# EAGLE board mybutton (EAGLE 9.3.0)
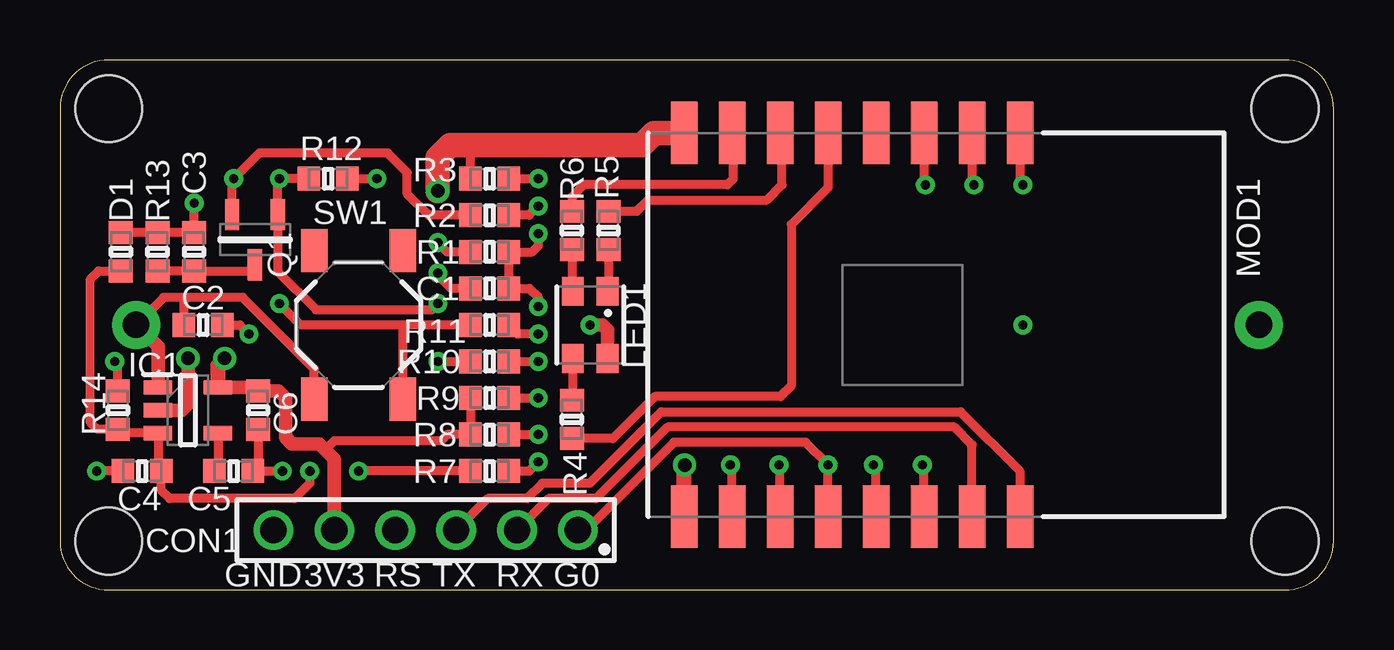
[diagram p0: board, top side]
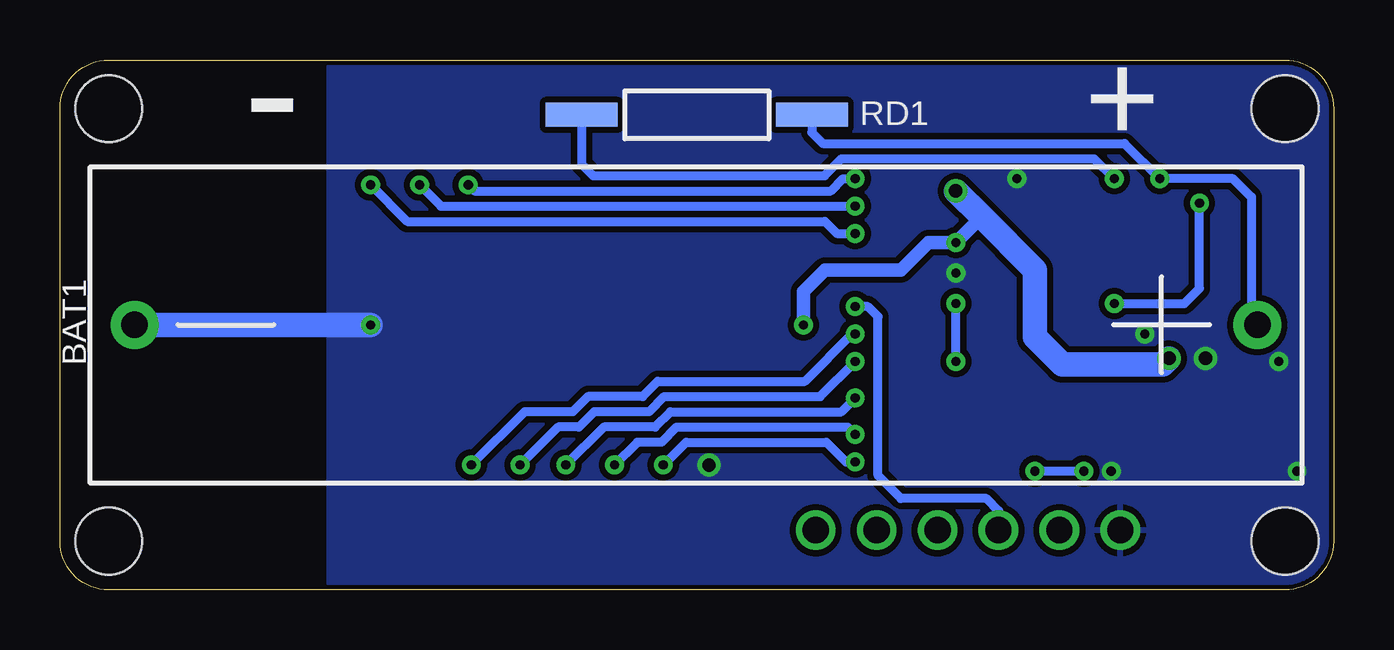
[diagram p1: board, bottom side, seen from below]

Size 53.09 x 22.1 mm. Coordinates in mm from the lower left corner, seen from the top.
Outline: 53.09,2.03 53.09,20.07 arc90 51.05,22.1 2.03,22.1 arc90 0,20.07 0,2.03 arc90 2.03,0 51.05,0 arc90 53.09,2.03
Copper layers (1*16): Top 0.035mm / dielectric 1.5mm / Bottom 0.035mm
Design rules "mydrc": minimum track width 15mil, minimum drill 0.35mm, track to track 10mil, track to pad 10mil, pad to pad 10mil, via to via 10mil, smd to smd 0mil, copper to edge 0mil, drill to drill 6mil, minimum pad ring 10mil, minimum via ring 8mil, stop-mask expansion 4mil, vias tented up to drill 25mil, thermal gap 10mil
Net classes: 0 default: width 0.381 mm, drill 0.381 mm, clearance 0.254 mm
Holes 2.79 mm at 2.03,20.07 2.03,2.03 51.05,2.03 51.05,20.07

## Footprints (pad centres in the part's own frame; a part is rotated, then mirrored left to right if it is on the bottom)
BCAAAPC = drill 1.1 pad 2: 1 0,0; 2 46.8,0
0603 = smd 0.95 x 1: 1 -0.8,0; 2 0.8,0
HEADER-6P-DIP-2_54MM = drill 1.1 pad 1.65: 1 0,0; 2 2.54,0; 3 5.08,0; 4 7.62,0; 5 10.16,0; 6 12.7,0
SOT23-5 = smd 1.2 x 0.6: 1 -1.25,0.95; 2 -1.25,0; 3 -1.25,-0.95; 4 1.25,-0.95; 5 1.25,0.95
LED-RGB-3528-PLCC4 = smd 1.2 x 0.9: 1 -1.4,0.725; 2 -1.4,-0.725; 3 1.4,-0.725; 4 1.4,0.725
ESP-12S = smd 2.6 x 1.1: 1 -8,7; 2 -8,5; 3 -8,3; 4 -8,1; 5 -8,-1; 6 -8,-3; 7 -8,-5; 8 -8,-7; 9 8,-7; 10 8,-5; 11 8,-3; 12 8,-1; 13 8,1; 14 8,3; 15 8,5; 16 8,7
SOT23-3 = smd 1.3 x 0.6: 1 -1.05,0.95; 2 -1.05,-0.95; 3 1.05,0
REED-SMD-5MM = smd 3 x 1: P$1 -4.8,0; P$2 4.8,0
BUTTON-4P-SMD-5X5 = smd 1.8 x 1.1: 1 -3.1,1.85; 2 -3.1,-1.85; 3 3.1,-1.85; 4 3.1,1.85

## Placement (x,y rotation side)
BAT1  [BCAAAPC]  3.17,11.05 180 bottom
C1  [0603]  17.91,12.57 0 top
C2  [0603]  5.97,11.05 180 top
C3  [0603]  5.59,14.1 90 top
C4  [0603]  3.43,4.95 0 top
C5  [0603]  7.24,4.95 180 top
C6  [0603]  8.26,7.49 90 top
CON1  [HEADER-6P-DIP-2_54MM]  21.59,2.49 180 top
D1  [0603]  2.54,14.1 270 top
IC1  [SOT23-5]  5.33,7.49 0 top
LED1  [LED-RGB-3528-PLCC4]  22.1,11.05 270 top
MOD1  [ESP-12S]  33.02,11.05 270 top
Q1  [SOT23-3]  8.13,14.61 270 top
R1  [0603]  17.91,14.1 0 top
R2  [0603]  17.91,15.62 0 top
R3  [0603]  17.91,17.14 0 top
R4  [0603]  21.34,7.11 270 top
R5  [0603]  22.86,14.99 90 top
R6  [0603]  21.34,14.99 90 top
R7  [0603]  17.91,4.95 180 top
R8  [0603]  17.91,6.48 180 top
R9  [0603]  17.91,8 0 top
R10  [0603]  17.91,9.53 180 top
R11  [0603]  17.91,11.05 180 top
R12  [0603]  11.18,17.14 180 top
R13  [0603]  4.06,14.1 90 top
R14  [0603]  2.41,7.49 270 top
RD1  [REED-SMD-5MM]  26.54,19.81 0 bottom
SW1  [BUTTON-4P-SMD-5X5]  12.45,11.05 90 top

## Library data of the parts
BAT1 C1-C6 CON1 D1 IC1 LED1 MOD1 Q1 R1-R14 RD1 SW1 = SamacSys_Parts

## Nets
GND: BAT1.2 C1.1 C2.1 C4.1 C5.1 C6.1 CON1.6 IC1.2 MOD1.9 R12.1 R14.1
N$1: CON1.1 MOD1.12 R9.2
N$2: CON1.2 MOD1.15
N$3: CON1.3 MOD1.16
N$4: C1.2 CON1.4 MOD1.1 R1.2
N$5: MOD1.2 R2.2
N$6: MOD1.3 R3.2
N$7: MOD1.5 R4.2
N$8: MOD1.6 R5.2
N$9: MOD1.7 R6.2
N$10: LED1.1 R5.1
N$11: LED1.2 R6.1
N$12: LED1.3 R4.1
N$13: BAT1.1 C2.2 IC1.1 Q1.2 R2.1 RD1.P$2 SW1.1
N$14: MOD1.14 R11.1
N$15: MOD1.13 R10.1
N$16: Q1.1 R10.2 R12.2 RD1.P$1
N$17: MOD1.11 R8.1
N$18: C3.1 Q1.3 R13.1
N$20: C3.2 D1.1 R11.2 R13.2 SW1.2
N$22: C5.2 IC1.4
N$24: C4.2 D1.2 IC1.3 R7.2 R14.2
N$25: MOD1.10 R7.1
VCC: C6.2 CON1.5 IC1.5 LED1.4 MOD1.8 R1.1 R3.1 R8.2 R9.1

## Tracks (layer width: path | path; a pad name or v marks a point on that pad's centre or on a via)
GND  (via drill 0.38, 0.56)
  Top 0.381: 26.02,5.19 v26.04,5.21 | C4.1 v1.52,4.95 | v9.27,4.95 C5.1 8.26,5.17 C6.1 | R14.1 2.41,9.4 v2.29,9.53 | R12.1 v13.21,17.14 | C1.1 16.3,12.57 15.75,13.12 v15.75,13.21 | C2.1 7.49,11.05 v7.87,10.67
  Top 0.559: IC1.2 5.08,7.49 5.33,7.75 v5.33,9.65
  Top 0.635: MOD1.9 26.02,5.19
  Bottom 1.016: BAT1.2 v40.13,11.05
  pour Bottom: 41.91,21.84 2.03,21.84 arc90 0.25,20.07 0.25,2.03 arc90 2.03,0.25 41.91,0.25
N$1  (via drill 0.38)
  Top 0.381: MOD1.12 32.02,5.19 v32,5.21 32,5.23 31.07,6.16 25.59,6.16 21.92,2.49 CON1.1 | R9.2 v19.94,8
  Bottom 0.381: v32,5.21 30.42,6.79 28.28,6.79 27.64,7.43 20.51,7.43 v19.94,8
N$2
  Top 0.381: MOD1.15 38.02,6.05 37.28,6.79 25.32,6.79 22.34,3.81 20.37,3.81 CON1.2
N$3
  Top 0.381: CON1.3 17.83,3.81 19.47,3.81 20.11,4.45 22.08,4.45 25.06,7.43 37.54,7.43 40.01,4.96 40.01,3.06 MOD1.16
N$4  (via drill 0.38)
  Top 0.381: MOD1.1 40.02,17 v40.13,16.89 | v19.94,11.81 19.94,12.19 19.56,12.57 C1.2 R1.2 19.68,14.1 19.94,14.35 v19.94,14.86
  Bottom 0.381: CON1.4 13.97,3.3 14.48,3.81 18.03,3.81 18.99,4.76 18.99,11.39 19.41,11.81 v19.94,11.81 | v40.13,16.89 38.61,15.37 21.21,15.37 20.7,14.86 v19.94,14.86
N$5  (via drill 0.38)
  Top 0.381: v19.94,16 19.56,15.62 R2.2 | MOD1.2 38.02,16.97 v38.1,16.89
  Bottom 0.381: v38.1,16.89 37.21,16 v19.94,16
N$6  (via drill 0.38)
  Top 0.381: R3.2 v19.94,17.14 | MOD1.3 36.02,16.94 v36.07,16.89
  Bottom 0.381: v36.07,16.89 35.81,16.64 20.95,16.64 20.45,17.14 v19.94,17.14
N$7
  Top 0.381: MOD1.5 32.02,16.78 30.48,15.24 30.48,8.51 30.03,8.06 24.8,8.06 23.05,6.31 R4.2
N$8
  Top 0.381: R5.2 24.04,15.79 24.51,16.26 29.46,16.26 30.1,16.89 30.1,18.97 MOD1.6
N$9
  Top 0.381: MOD1.7 28.07,19 28.07,17.14 27.81,16.89 21.84,16.89 21.34,16.38 R6.2
N$10
  Top 0.381: R5.1 22.86,12.49 LED1.1
N$11
  Top 0.381: R6.1 21.34,12.46 21.31,12.43
  Top 0.4: 21.31,12.43 LED1.2
N$12
  Top 0.381: LED1.3 21.37,7.95 R4.1
N$13  (via drill 0.38)
  Top 0.381: SW1.1 10.6,9.22 7.62,12.19 5.21,12.19 | C2.2 5.17,12.15 5.21,12.19 | R2.1 15.37,15.62 14.48,16.51 14.48,17.4 13.66,18.22 8.31,18.22 v7.24,17.14 7.18,17.14 Q1.2 | BAT1.1 4.32,12.19 5.21,12.19
  Top 0.559: BAT1.1 4.08,10.14 IC1.1
  Bottom 0.381: RD1.P$2 21.74,19.08 21.29,18.62 8.71,18.62 v7.24,17.14 4.19,17.14 3.43,16.38 3.43,11.3 BAT1.1
N$14  (via drill 0.38)
  Top 0.381: MOD1.14 36.02,5.13 v35.94,5.21 | v19.94,10.67 19.09,10.67 R11.1
  Bottom 0.381: v35.94,5.21 33.72,7.43 31.72,7.43 31.08,8.06 28.8,8.06 28.17,8.7 22.04,8.7 20.07,10.67 v19.94,10.67
N$15  (via drill 0.38)
  Top 0.381: MOD1.13 34.02,5.1 v33.91,5.21 | R10.1 v19.94,9.53
  Bottom 0.381: v33.91,5.21 32.32,6.79 31.45,6.79 30.82,7.43 28.54,7.43 27.91,8.06 21.4,8.06 v19.94,9.53
N$16  (via drill 0.38)
  Top 0.381: v15.75,11.94 15.49,11.68 10.67,11.68 9.08,13.27 Q1.1 9.08,17.08 v9.14,17.14 R12.2 | v15.75,9.53 R10.2
  Bottom 0.381: v15.75,9.53 v15.75,11.94 | RD1.P$1 31.34,17.75 30.86,17.27 21.22,17.27 20.51,17.98 9.98,17.98 v9.14,17.14
N$17  (via drill 0.38)
  Top 0.381: MOD1.11 30.02,5.16 v29.97,5.21 | R8.1 v19.94,6.48
  Bottom 0.381: v29.97,5.21 29.02,6.16 28.02,6.16 27.38,6.79 20.25,6.79 v19.94,6.48
N$18
  Top 0.381: Q1.3 7.87,13.3 C3.1 R13.1
N$20  (via drill 0.38)
  Top 0.381: D1.1 R13.2 C3.2 v5.59,16.13 | v9.14,11.94 10.03,11.05 14.35,11.05 | R11.2 14.35,11.05 | SW1.2 14.3,10.99 14.35,11.05
  Bottom 0.381: v5.59,16.13 5.59,12.57 6.22,11.94 v9.14,11.94
N$22
  Top 0.381: IC1.4 6.58,5.1 C5.2
N$24  (via drill 0.38)
  Top 0.381: D1.2 1.61,13.3 1.27,12.95 1.27,6.99 1.56,6.69 R14.2 2.56,6.54 IC1.3 4.08,5.1 C4.2 4.23,4.15 4.57,3.81 9.78,3.81 10.41,4.45 v10.41,4.95 | R7.2 v12.45,4.95
  Bottom 0.381: v12.45,4.95 v10.41,4.95
N$25  (via drill 0.38)
  Top 0.381: R7.1 19.56,4.95 v19.94,5.33 | MOD1.10 28.02,5.13 v27.94,5.21
  Bottom 0.381: v27.94,5.21 26.99,6.16 21.14,6.16 20.32,5.33 v19.94,5.33
VCC  (via drill 0.38, 0.56)
  Top 0.381: 8.11,8.44 C6.2 | R9.1 R8.2 16.13,6.48 15.88,6.22 11.43,6.22 11.05,5.84 | R3.1 17.11,18.5 17.14,18.54 | R1.1 16.13,14.1 v15.75,14.48
  Top 0.559: IC1.5 8.11,8.44 | C6.2 9.11,8.29 9.4,8 9.4,6.35 9.65,6.1 10.79,6.1 11.05,5.84 11.43,5.46 CON1.5 | LED1.4 22.82,10.83 22.61,11.05 v22.1,11.05
  Top 0.635: IC1.5 6.58,9.38 v6.86,9.65
  Top 1.016: MOD1.8 24.76,19.05 24.26,18.54 17.14,18.54 16.26,18.54 15.75,18.03 v15.75,16.64
  Bottom 0.559: v22.1,11.05 22.1,12.45 21.21,13.34 18.03,13.34 16.89,14.48 v15.75,14.48 14.67,15.56
  Bottom 1.016: v6.86,9.65 7.11,9.4 11.3,9.4 12.45,10.54 12.45,13.34 14.67,15.56 v15.75,16.64

## Text on the board
tPlace: GND | 3V3 | RS | TX | RX | G0
bPlace: + | -